# Altium PCB 7 segment 1 layer.PcbDoc
Units mil, origin at the board's own origin, x right, y up, seen from the top; angles counter-clockwise.
Board outline 5255.91 x 3681.1 mil, 2 copper layers (Top Layer, Bottom Layer); 50 components, 87 nets, 289 pads, 0 vias.
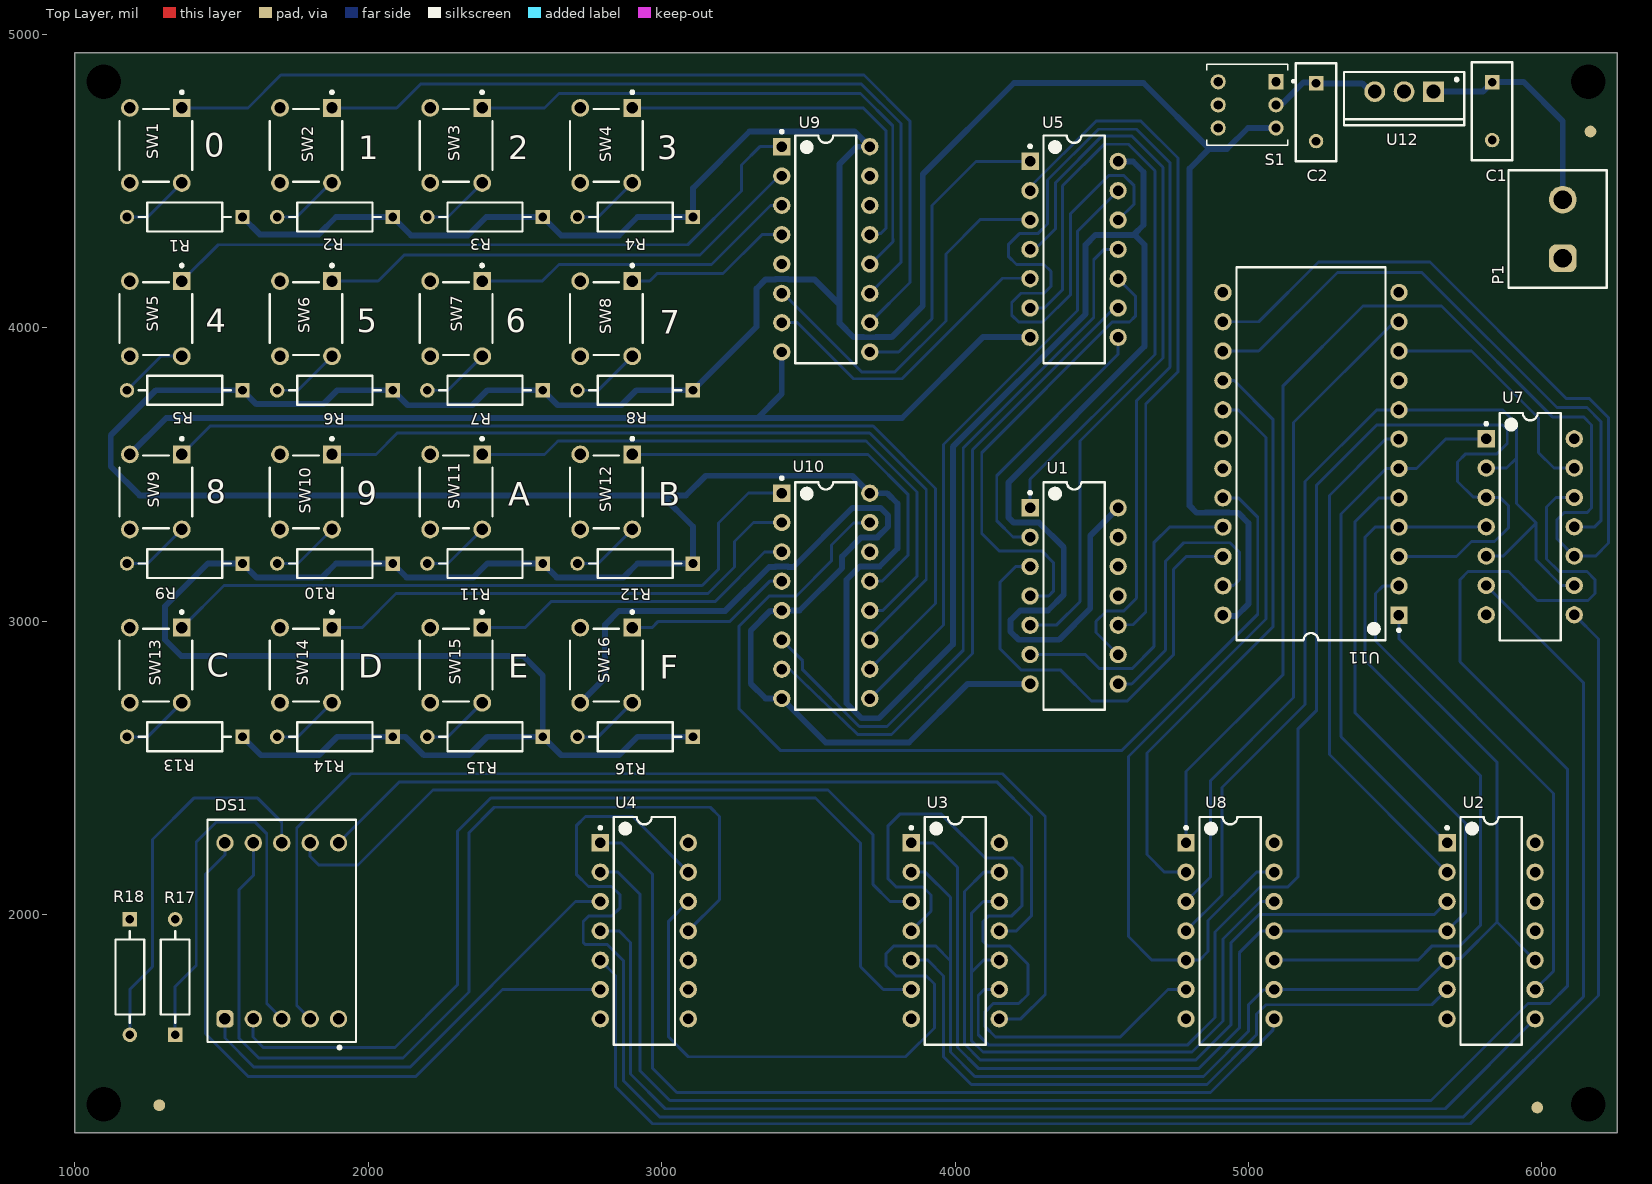
[diagram p0: Top Layer view]
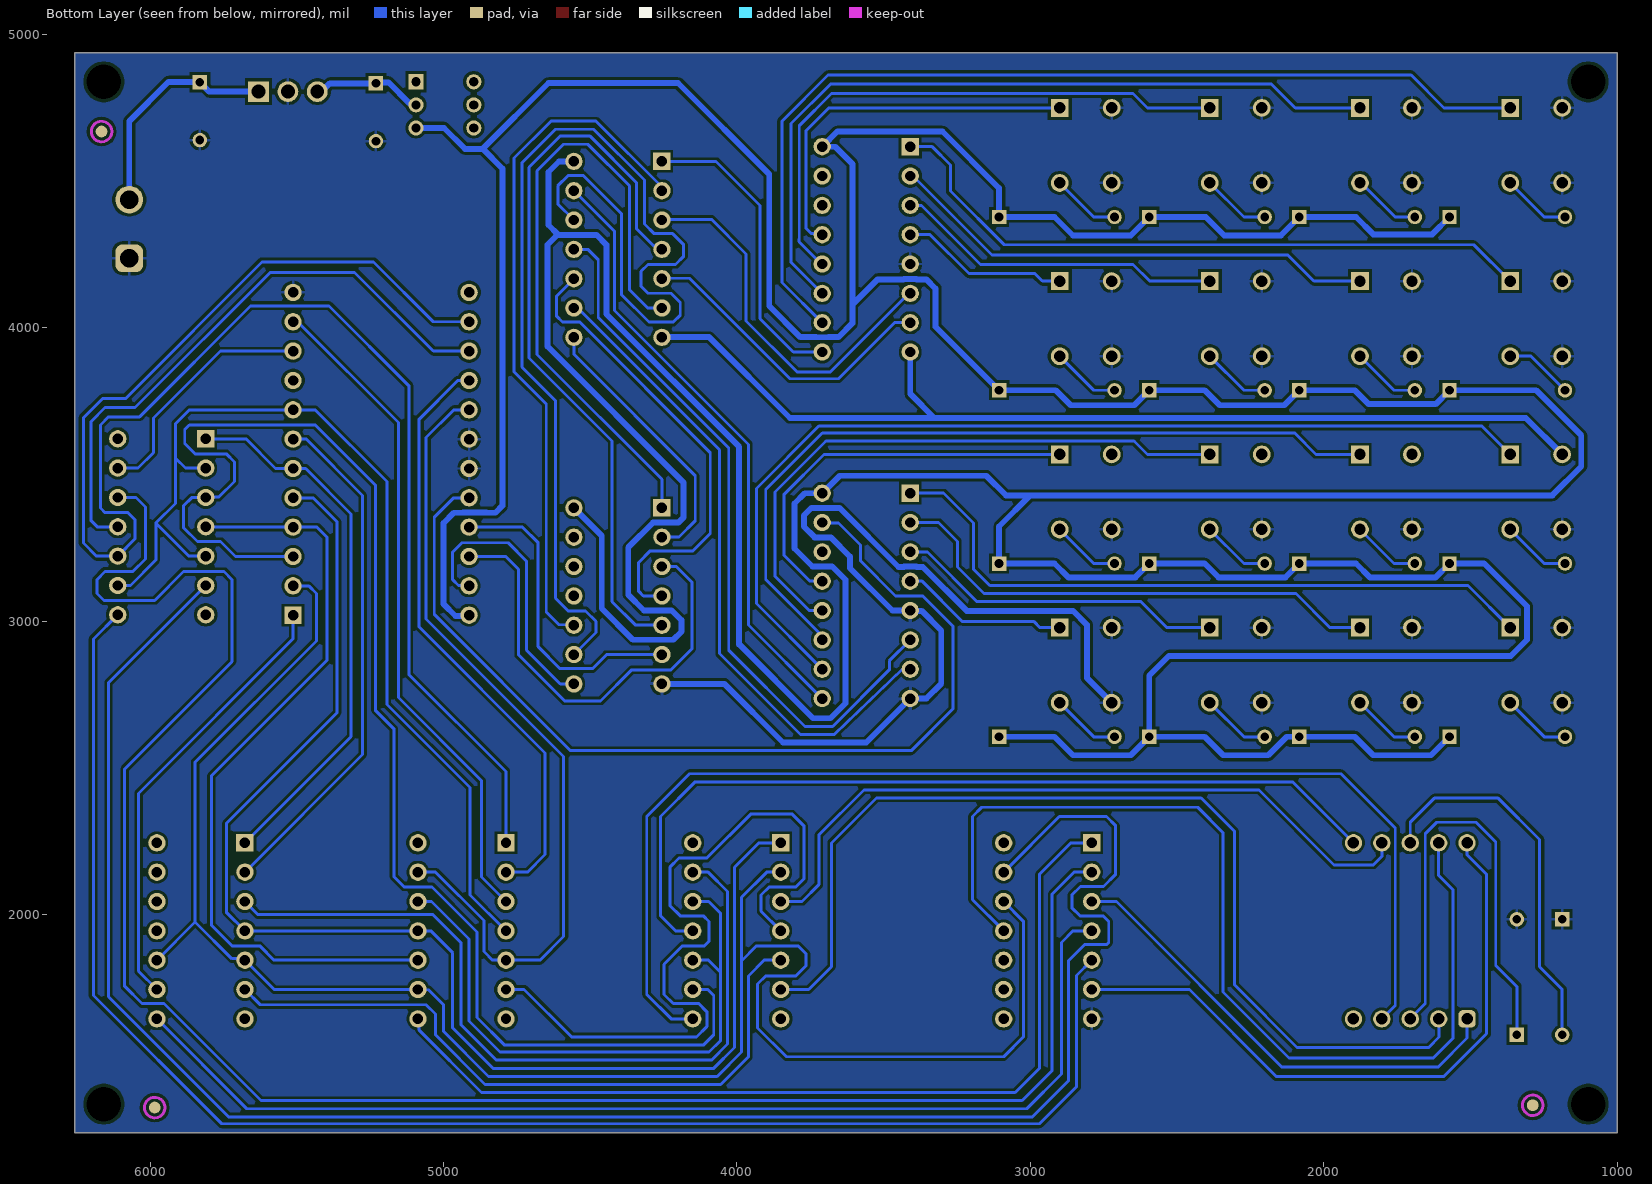
[diagram p1: Bottom Layer view, seen from below]
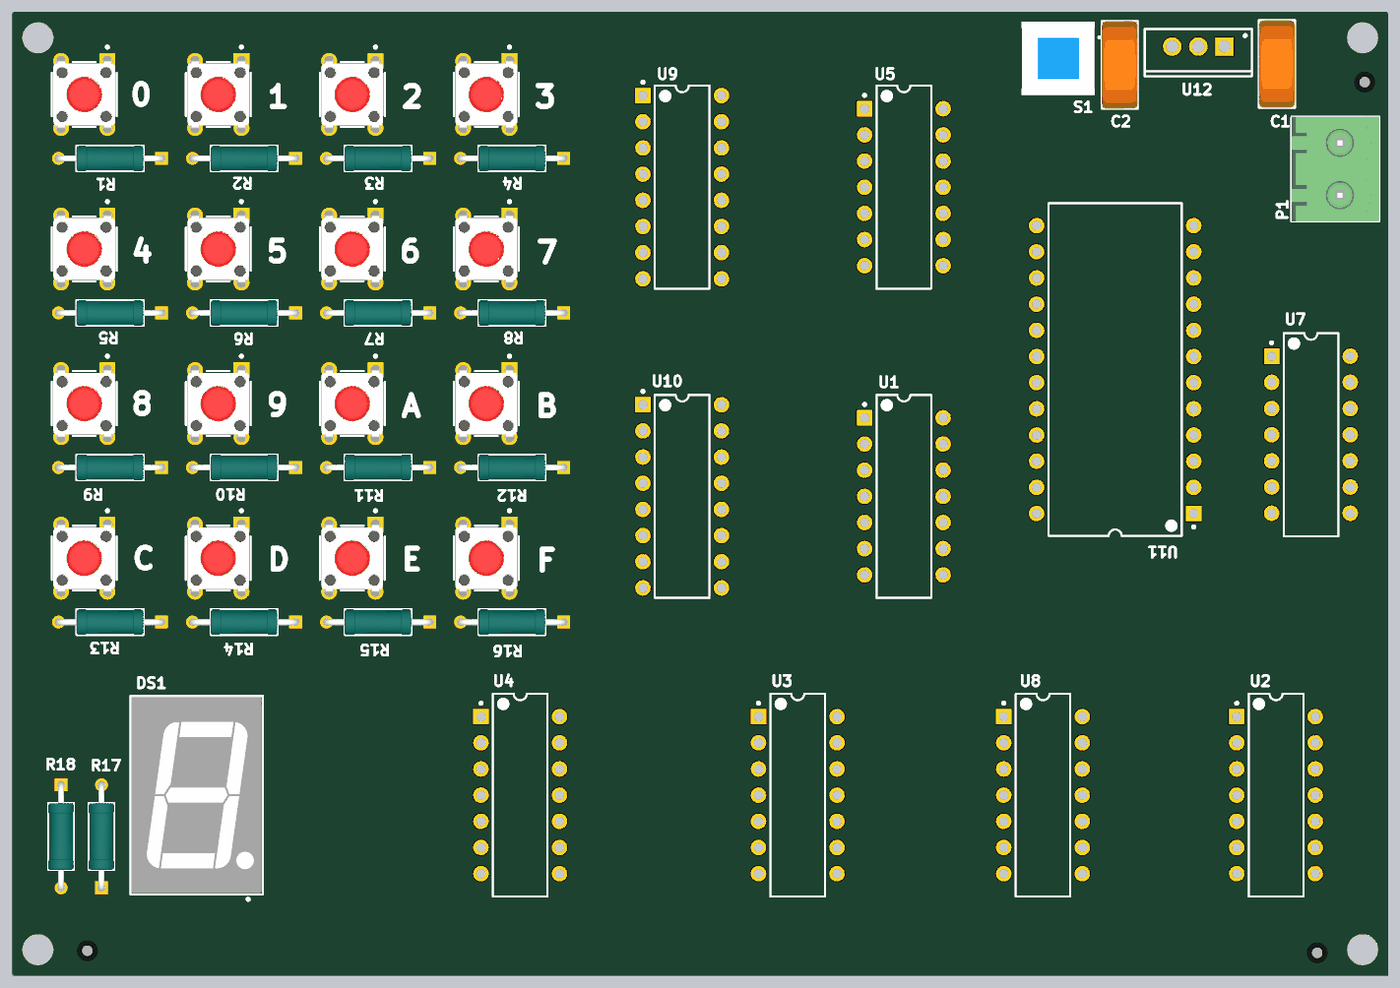
[diagram p2: 3D render of the assembled board from above, using the file's embedded part models]

## Layer stack, top to bottom
Top Solder: solder mask 0.4, Solder Resist, Dk 3.5
Top Layer: signal copper 1.4
Dielectric 1: dielectric 12.6, FR-4, Dk 4.8
Bottom Layer: signal copper 1.4
Bottom Solder: solder mask 0.4, Solder Resist, Dk 3.5

## Board outline
1000,1255.91 6255.91,1255.91 6255.91,4937.01 1000,4937.01

## Design rules (kind name [scope] priority, off if disabled: settings)
Clearance [All] p1: gap=10 ignorepadtopadclearanceinfootprint=FALSE except(118.11: Via-Via Via-Hole)
HoleSize [All] p1: absolutevalues=TRUE maxlimit=50 minlimit=1 maxpercent=80.000 minpercent=20.000
PolygonConnect [All] p1: connectstyle=Relief reliefconductorwidth=10 reliefentries=4 polygonreliefangle="90 Angle" airgapwidth=10
RoutingVias [All] p1: holewidth=28 width=50 viastyle="Through Hole" minholewidth=28 minwidth=50 maxholewidth=28 maxwidth=50
SolderMaskExpansion [All] p1: expansion=4 istentingtop=FALSE
SupplyNets "Schematic Supply Nets_1" [InNet('+5')] p1: voltage=0.000
SupplyNets "Schematic Supply Nets" [InNet('GND')] p2: voltage=0.000
UnRoutedNet [All] p1 off:
Width [All] p1: maxlimit=25 minlimit=10 preferedwidth=10 toplayer_maxwidth=10 minimp=50.000000 maximp=50.000000 favimp=50.000000
28 further rules are at their usual default settings.

## Classes and differential pairs
component class Designator: R1 R2 R3 R4 R5 R6 R7 R8 R9 R10 R11 R12 R13 R14 R15 R16 SW1 SW2 SW3 SW4 SW5 SW6 SW7 SW8 SW9 SW10 SW11 SW12 SW13 SW14 SW15 SW16
component class Top: C1 C2 P1 S1 U12

## Components (designator, comment, footprint, x,y, rotation, side; value= is the part's Value field where it differs from the comment)
C1 "D222K33Y5PL6UJ5R" FP-D222K33Y5PL6UJ5R-MFG 5830.16,4738.62 r270 top value=2.2nF
C2 "D222K33Y5PL6UJ5R" FP-D222K33Y5PL6UJ5R-MFG 5230.16,4735.2 r270 top value=2.2nF
DS1 "157142V12703" WL-T7DS_L19W12.6H7.9 1704.72,1944.88 r0 top
P1 "691311500002" 691311500002 6053.15,4337.01 r90 top
R1 "MRS25000C1001FCT00" FP-MRS25-MFG 1374.02,4377.95 r180 top
R2 "MRS25000C1001FCT00" FP-MRS25-MFG 1885.83,4377.95 r180 top
R3 "MRS25000C1001FCT00" FP-MRS25-MFG 2397.64,4377.95 r180 top
R4 "MRS25000C1001FCT00" FP-MRS25-MFG 2909.45,4377.95 r180 top
R5 "MRS25000C1001FCT00" FP-MRS25-MFG 1374.02,3787.4 r180 top
R6 "MRS25000C1001FCT00" FP-MRS25-MFG 1885.83,3787.4 r180 top
R7 "MRS25000C1001FCT00" FP-MRS25-MFG 2397.64,3787.4 r180 top
R8 "MRS25000C1001FCT00" FP-MRS25-MFG 2909.45,3787.4 r180 top
R9 "MRS25000C1001FCT00" FP-MRS25-MFG 1374.02,3196.85 r180 top
R10 "MRS25000C1001FCT00" FP-MRS25-MFG 1885.83,3196.85 r180 top
R11 "MRS25000C1001FCT00" FP-MRS25-MFG 2397.64,3196.85 r180 top
R12 "MRS25000C1001FCT00" FP-MRS25-MFG 2909.45,3196.85 r180 top
R13 "MRS25000C1001FCT00" FP-MRS25-MFG 1374.02,2606.3 r180 top
R14 "MRS25000C1001FCT00" FP-MRS25-MFG 1885.83,2606.3 r180 top
R15 "MRS25000C1001FCT00" FP-MRS25-MFG 2397.64,2606.3 r180 top
R16 "MRS25000C1001FCT00" FP-MRS25-MFG 2909.45,2606.3 r180 top
R17 "MRS25000C1001FCT00" FP-MRS25-MFG 1341.34,1787.4 r90 top
R18 "MRS25000C1001FCT00" FP-MRS25-MFG 1187.01,1787.4 r270 top
S1 "TL2230OAF140" SW_TL2230OAF140 4995.16,4760.2 r270 top
SW1 "1-1825910-5" FP-1-1825910-5-MFG 1275.59,4622.05 r0 top
SW2 "1-1825910-5" FP-1-1825910-5-MFG 1787.4,4622.05 r0 top
SW3 "1-1825910-5" FP-1-1825910-5-MFG 2299.21,4622.05 r0 top
SW4 "1-1825910-5" FP-1-1825910-5-MFG 2811.02,4622.05 r0 top
SW5 "1-1825910-5" FP-1-1825910-5-MFG 1275.59,4031.5 r0 top
SW6 "1-1825910-5" FP-1-1825910-5-MFG 1787.4,4031.5 r0 top
SW7 "1-1825910-5" FP-1-1825910-5-MFG 2299.21,4031.5 r0 top
SW8 "1-1825910-5" FP-1-1825910-5-MFG 2811.02,4031.5 r0 top
SW9 "1-1825910-5" FP-1-1825910-5-MFG 1275.59,3440.94 r0 top
SW10 "1-1825910-5" FP-1-1825910-5-MFG 1787.4,3440.94 r0 top
SW11 "1-1825910-5" FP-1-1825910-5-MFG 2299.21,3440.94 r0 top
SW12 "1-1825910-5" FP-1-1825910-5-MFG 2811.02,3440.94 r0 top
SW13 "1-1825910-5" FP-1-1825910-5-MFG 1275.59,2850.39 r0 top
SW14 "1-1825910-5" FP-1-1825910-5-MFG 1787.4,2850.39 r0 top
SW15 "1-1825910-5" FP-1-1825910-5-MFG 2299.21,2850.39 r0 top
SW16 "1-1825910-5" FP-1-1825910-5-MFG 2811.02,2850.39 r0 top
U1 "SN7432N" N0014A 4405.51,3086.61 r0 top
U2 "SN74S08N" N0014A 5826.77,1944.88 r0 top
U3 "SN74S08N" N0014A 4000.39,1944.88 r0 top
U4 "SN74S08N" N0014A 2940.55,1944.88 r0 top
U5 "SN74HCU04N" N0014A 4405.51,4267.72 r0 top
U7 "SN74LS11N" N0014A 5960.24,3322.05 r0 top
U8 "SN74LS11N" N0014A 4937.01,1944.88 r0 top
U9 "SN74LS148N" N0016A 3559.06,4267.72 r0 top
U10 "SN74LS148N" N0016A 3559.06,3086.61 r0 top
U11 "SN74154N" N0024A 5212.6,3570.87 r180 top
U12 "L7805CP" TO220FP 5530.16,4805.2 r180 top

## Footprints (in the part's own frame and the unit in brackets; to place one, negate y for a bottom-side part, rotate by r counter-clockwise, add the part's x,y. Pads: shape width x height; smd on the part's side, far side on the other; paste and mask are expansions set on the pad)
691311500002 [mm] "5,08mm - PCB Headers - Vertical - Opened ends -02p"
  rrect50% 2.4x2.4 hole 1.6: 1(-2.54,-0.45)
  round 2.4 hole 1.6: 2(2.54,-0.45)
  silkscreen extent -5.08,-4.25 5.08,4.25, body extent -5.08,-4.25 5.08,4.25, height 12.05
FP-1-1825910-5-MFG [mm]
  rect 1.54x1.54 hole 0.99 paste-2539.97 mask+0: 1(2.25,3.25)
  round 1.54 hole 0.99 paste-2539.97 mask+0: 2(2.25,-3.25) 3(-2.25,3.25) 4(-2.25,-3.25)
  silkscreen extent -3.15,-3.15 3.15,4.72, body extent -3.24,-4.12 3.24,4.12, height 0.25
FP-D222K33Y5PL6UJ5R-MFG [mm]
  rect 1.25x1.25 hole 0.75 paste-2539.97 mask+0: 1(-2.5,0)
  round 1.25 hole 0.75 paste-2539.97 mask+0: 2(2.5,0)
  silkscreen extent -4.25,-1.75 4.25,1.75, body extent -4.35,-1.85 4.35,1.85, height 0.25
FP-MRS25-MFG [mm]
  rect 1.25x1.25 hole 0.75 paste-2539.97 mask+0: 1(-5,0)
  round 1.25 hole 0.75 paste-2539.97 mask+0: 2(5,0)
  silkscreen extent -3.97,-1.25 3.98,1.25, body extent -5.72,-1.35 5.73,1.35, height 0.25
N0014A [mm] "DIP, 14-Leads, Body 19.7x6.6mm, Pitch 2.54mm"
  rect 1.5x1.5 hole 0.9: 1(-3.81,7.62)
  round 1.5 hole 0.9: 2(-3.81,5.08) 3(-3.81,2.54) 4(-3.81,0) 5(-3.81,-2.54) 6(-3.81,-5.08) 7(-3.81,-7.62) 8(3.81,-7.62) 9(3.81,-5.08) 10(3.81,-2.54) 11(3.81,0) 12(3.81,2.54) 13(3.81,5.08) 14(3.81,7.62)
  silkscreen extent -3.93,-9.85 2.65,9.85, body extent -3.95,-9.85 3.95,9.85, height 5.08
N0016A [mm] "DIP, 16-Leads, Body 19.7x6.6mm, Pitch 2.54mm"
  rect 1.5x1.5 hole 0.9: 1(-3.81,8.89)
  round 1.5 hole 0.9: 2(-3.81,6.35) 3(-3.81,3.81) 4(-3.81,1.27) 5(-3.81,-1.27) 6(-3.81,-3.81) 7(-3.81,-6.35) 8(-3.81,-8.89) 9(3.81,-8.89) 10(3.81,-6.35) 11(3.81,-3.81) 12(3.81,-1.27) 13(3.81,1.27) 14(3.81,3.81) 15(3.81,6.35) 16(3.81,8.89)
  silkscreen extent -3.93,-9.85 2.65,10.31, body extent -3.95,-9.85 3.95,9.85, height 5.08
N0024A [mm] "DIP, 24-Leads, Body 32.25x14.2mm, Pitch 2.54mm"
  rect 1.5x1.5 hole 0.9: 1(-7.62,13.97)
  round 1.5 hole 0.9: 2(-7.62,11.43) 3(-7.62,8.89) 4(-7.62,6.35) 5(-7.62,3.81) 6(-7.62,1.27) 7(-7.62,-1.27) 8(-7.62,-3.81) 9(-7.62,-6.35) 10(-7.62,-8.89) 11(-7.62,-11.43) 12(-7.62,-13.97) 13(7.62,-13.97) 14(7.62,-11.43) 15(7.62,-8.89) 16(7.62,-6.35) 17(7.62,-3.81) 18(7.62,-1.27) 19(7.62,1.27) 20(7.62,3.81) 21(7.62,6.35) 22(7.62,8.89) 23(7.62,11.43) 24(7.62,13.97)
  silkscreen extent -7.75,-16.15 6.45,16.15, body extent -7.76,-16.12 7.76,16.12, height 5.08
SW_TL2230OAF140 [mm]
  rect 1.308x1.308 / inner round 1.308 / far side rect 1.308x1.308 hole 0.8: 1(-2,2.5)
  round 1.308 hole 0.8: 2(0,2.5) 3(2,2.5) 4(-2,-2.5) 5(0,-2.5) 6(2,-2.5)
  silkscreen extent -3.5,-3.5 3.5,4.1, body extent -3.5,-3.5 3.5,3.5, height 12.5
TO220FP [mm] "TO, Thru-Hole, Vertical, Heatsink Mounted; 3 In-Line Leads; Pitch 2.54 mm"
  rect 1.8x1.8 hole 1.2: 1(-2.54,0)
  round 1.8 hole 1.2: 2(0,0) 3(2.54,0)
  silkscreen extent -5.2,-1.7 5.2,2.9, body extent -5.25,-1.75 5.25,2.95, height 20
WL-T7DS_L19W12.6H7.9 [mm] "7 Segments Display THT Single Digit , body 12.6x19mm"
  rrect50% 1.5x1.5 hole 1: 1(-4.92,-7.62)
  round 1.5 hole 1: 2(-2.46,-7.62) 3(0,-7.62) 4(2.46,-7.62) 5(4.92,-7.62) 6(4.92,7.62) 7(2.46,7.62) 8(0,7.62) 9(-2.46,7.62) 10(-4.92,7.62)
  silkscreen extent -6.43,-10.22 6.43,9.62, body extent -6.3,-9.5 6.3,9.5, height 8.1

## Part data
C1 C2: library part CMP-02417-000074-1, "CAP CER 2200PF 500V Y5P RADIAL", Capacitance=2.2nF, Case/Package=Radial, Dielectric=Y5P, Max Operating Temperature=85°C, Min Operating Temperature=-30°C, Package Quantity=2000, Resistor Type=Ceramic, Tolerance=10%, Voltage Rating=500V, Construction=RADIAL, Contact Plating=Tin, Depth=4mm, Lead Diameter=0.6mm, Lead Pitch=5mm, Lead/Base Style=Kinked, Mount="Through Hole", Packaging="Tape and Reel", Radiation Hardening=No, RoHS Compliant=Yes, Series=D, Termination=Radial
DS1: library part CMP-03913-119894004-1, "157142V12703 7-Seg Display, Comm Cathode, Grn, 46Mcd Rohs Compliant: Yes", Forward Current=100mA, Forward Voltage=2.2V, Max Operating Temperature=85°C, Max Reverse Voltage (DC)=5V, Min Operating Temperature=-40°C, Dominant Wavelength=572nm, Height=8mm, Length=19mm, Luminous Intensity=25mcd, NexarPartId=119894004, RoHS=Compliant, Width=12.6mm
P1: library part CMP-1502-02123-2, Color=Green, Current=20A, Voltage=300V, Contact Material=Brass, Contact Plating=Tin, Gender=Male, Height=12mm, Lead Pitch=5.08mm, Length=8.5mm, Mount="Through Hole", NexarPartId=8917741, Number of Contacts=2, Number of Levels=1, Number of Pins=2, Number of Positions Per Level=2, Number of Rows=1, Orientation=Vertical, Packaging=Box, Pitch=5.08mm, REACH SVHC=Unknown, RoHS=Compliant, Termination=Solder, Width=10.16mm
R1 R2 R3 R4 R5 R6 R7 R8 R9 R10 R11 R12 R13 R14 R15 R16 R17 R18: library part CMP-02408-000051-1, "RES 1K OHM 0.6W 1% AXIAL", Case/Package=Axial, Max Operating Temperature=155°C, Max Power Dissipation=600mW, Min Operating Temperature=-55°C, Package Quantity=5000, Resistance=1kR, Resistance Tolerance=1%, Resistor Type="Metal Film", Temperature Coefficient=50ppm/°C, Voltage Rating=350V, Construction=Cylindrical, Contact Plating=Tin, Diameter=2.5mm, Lead Diameter=0.6mm, Lead Free="Lead Free", Length=6.5mm, Military Standard=Not, Mount="Through Hole", Number of Pins=2, Number of Terminations=2, Packaging="Tape and Reel", Power Rating=600mW, Radiation Hardening=No, RoHS Compliant=Yes, Series=MRS25, Technology="THIN FILM", Termination=Axial, Tolerance=1%, Voltage Rating (DC)=350V, Weight=0.00776oz, Width=2.5mm
S1: "Pushbutton Switch DPDT Standard Through Hole", Package=None, Check_prices=https://www.snapeda.com/parts/TL2230OAF140/E-Switch/view-part/?ref=eda, MF=E-Switch, MP=TL2230OAF140, SnapEDA_Link=https://www.snapeda.com/parts/TL2230OAF140/E-Switch/view-part/?ref=snap
SW1 SW2 SW3 SW4 SW5 SW6 SW7 SW8 SW9 SW10 SW11 SW12 SW13 SW14 SW15 SW16: library part CMP-03407-000006-1, "SWITCH TACTILE SPST-NO 0.05A 24V", Actuator Color=Red, Contact Current Rating=50mA, Contact Resistance=100mR, Max Operating Temperature=85°C, Max Voltage Rating (DC)=24V, Min Operating Temperature=-35°C, Operating Force=2.55N, Package Quantity=750, Actuator Length=5.9mm, Actuator Material=PBT, Actuator Type=Standard, Contact Material=Brass, Contact Plating=Silver, Electrical Life=100000Cycles, Illumination Type=Non-Illuminated, Length=5.99mm, Max Current Rating=50mA, Mechanical Life=100000Cycles, Mount="Through Hole", Orientation=Straight, Packaging="Loose Piece", Radiation Hardening=No, RoHS Compliant=Yes, Series="FSMJ, Alcoswitch", Switch Function=Off-Mom, Switch Travel=0.25mm, Termination="PC Pins", Throw Configuration=SPST, Type=Switch, Voltage Rating (DC)=24V
U1: library part CMP-1573-00140-3, "Quad 2-input positive-OR gates, N0014A, TUBE", F @ Nom Voltage(Max)(Mhz)=100, Generic Part Number=SN7432, ICC @ Nom Voltage(Max)(mA)=0.038, Manufacturer="Texas Instruments", Operating Temperature Range(C)="0 to 70", Rating=Catalog, tpd @ Nom Voltage(Max)(ns)=22, Voltage(Nom)(V)=5, Bits(#)=4, Code_JEDEC=MS-001, DatasheetVersion=SDLS100, Input Type=TTL, Output Drive (IOL/IOH)(Max)(mA)=0.8/-16, Output Type=TTL, PackageReference=N0014A, PackageVersion=http://www.ti.com/lit/ml/mpdi002c/mpdi002c.pdf, VCC(Max)(V)=5.25, VCC(Min)(V)=4.75
U2 U3 U4: library part CMP-0777-00282-3, "Quad 2-input positive-AND gates, N0014A, TUBE", F @ Nom Voltage(Max)(Mhz)=50, Generic Part Number=SN74S08, ICC @ Nom Voltage(Max)(mA)=0.032, Manufacturer="Texas Instruments", Operating Temperature Range(C)="0 to 70", Rating=Catalog, tpd @ Nom Voltage(Max)(ns)=7.5, Voltage(Nom)(V)=5, Bits(#)=4, DatasheetVersion=SDLS033, Input Type=TTL, Output Drive (IOL/IOH)(Max)(mA)=-24/24, Output Type=TTL, PackageReference=N0014A, Schmitt Trigger=No, Technology Family=S, VCC(Max)(V)=5.25, VCC(Min)(V)=4.75
U5: library part CMP-1615-00910-2, "Hex Inverters, N0014A, TUBE", F @ Nom Voltage(Max)(Mhz)=20, Generic Part Number=SN74HCU04, ICC @ Nom Voltage(Max)(mA)=0.02, Manufacturer="Texas Instruments", Operating Temperature Range(C)="-40 to 85", Rating=Catalog, Voltage(Nom)(V)=5, Bits(#)=6, Code_JEDEC=MS-001, DatasheetVersion=SCLS079E, Input Type=CMOS, Output Drive (IOL/IOH)(Max)(mA)=-4/4, Output Type=CMOS, PackageReference=N0014A, Schmitt Trigger=No, Technology Family=HC, tpd @ Nom Voltage(Max)(ns)=20, VCC(Max)(V)=6, VCC(Min)(V)=2
U7 U8: library part CMP-0777-00254-3, "Triple 3-input positive-AND gates, N0014A, TUBE", F @ Nom Voltage(Max)(Mhz)=35, Generic Part Number=SN74LS11, ICC @ Nom Voltage(Max)(mA)=0.0036, Manufacturer="Texas Instruments", Operating Temperature Range(C)="0 to 70", Rating=Catalog, tpd @ Nom Voltage(Max)(ns)=15, Voltage(Nom)(V)=5, Bits(#)=3, DatasheetVersion=SDLS131, Input Type=TTL, Output Drive (IOL/IOH)(Max)(mA)=0/8, Output Type=TTL, PackageReference=N0014A, Schmitt Trigger=No, Technology Family=LS, VCC(Max)(V)=5.25, VCC(Min)(V)=4.75
U9 U10: library part CMP-1633-00673-2, "8-line to 3-line priority encoder, N0016A, TUBE", F @ Nom Voltage(Max)(Mhz)=35, Generic Part Number=SN74LS148, ICC @ Nom Voltage(Max)(mA)=20, Manufacturer="Texas Instruments", Operating Temperature Range(C)="0 to 70", Rating=Catalog, tpd @ Nom Voltage(Max)(ns)=19, Voltage(Nom)(V)=5, Bits(#)=8, Channels(#)=1, Code_JEDEC=MS-001, Configuration=8：3, DatasheetVersion=SDLS053B, Function=Encoder/Multiplexer, Input Type=TTL, Output Drive (IOL/IOH)(Max)(mA)=8/-0.4, Output Type=TTL, PackageReference=N0016A, Schmitt Trigger=No, Technology Family=LS, Type=Standard, VCC(Max)(V)=5.25, VCC(Min)(V)=4.75
U11: library part CMP-1633-00734-2, "4-Line To 16-Line Decoders/Demultiplexers, N0024A, TUBE", Generic Part Number=SN74154, Manufacturer="Texas Instruments", Code_JEDEC=MS-011, DatasheetVersion=SDLS056, PackageReference=N0024A
U12: library part CMP-0244-00474-1, "Positive Voltage Regulator, 5V, 3-Pin TO-220FP", ComponentLink1Description="Manufacturer URL", ComponentLink1URL=http://www.st.com, ComponentLink2Description=Datasheet, ComponentLink2URL=http://www.st.com/internet/com/TECHNICAL_RESOURCES/TECHNICAL_LITERATURE/DATASHEET/CD00000444.pdf, DatasheetVersion=16/11/2011, PackageDescription="TO, Thru-Hole, Vertical, Heatsink Mounted; 3 In-Line Leads; Pitch 2.54 mm", PackageReference=TO220FP, PackageVersion=2011

## Free pads (board coordinates)
  round 0 hole 118.11: 13(6157.48,4838.58) 14(1098.43,4838.58) 15(1098.43,1354.33) 16(6157.48,1354.33)
  round 40 smd mask+20: 20(1287.4,1350.39) 20(5984.25,1342.52) 20(6165.35,4669.29)
  round 40 smd far side mask+20: 20(1287.4,1350.39) 20(5984.25,1342.52) 20(6165.35,4669.29)

## Nets (pads, with @x,y where several pads share a name; then routed paths per layer and width w, separated by ;. In a path a pad name is that pad's centre, name@x,y a point inside that pad or via, vN(x,y) a via of type N, cw(c..) or ccw(c..) an arc to the next point about the centre after c; other vN are vias at no path point)
1A0': U5.1 U9.9 | length 1041.7
  Bottom Layer w10: U9.9 3807.48,3917.72 3921.26,4031.5 3921.26,4417.32 4070.87,4566.93 4254.72,4566.93 U5.1
1A1': U5.5 U9.7 | length 1068.1
  Bottom Layer w10: U9.7 3462.6,4017.72 3653.54,3826.77 3818.9,3826.77 4161.42,4169.29 4253.94,4169.29 U5.5
1A2': U5.3 U9.6 | length 1307.2
  Bottom Layer w10: U9.6 3413.78,4117.72 3681.1,3850.39 3795.28,3850.39 3968.5,4023.62 3968.5,4251.97 4086.61,4370.08 4253.15,4370.08 U5.3
2A0': U5.13 U10.9 | length 2082.1
  Bottom Layer w10: U10.9@3709.06,2736.22 3960.63,2987.8 3960.63,3602.36 4417.32,4059.06 4417.32,4329.53 U5.13
2A1': U5.9 U10.7 | length 2245.1
  Bottom Layer w10: U10.7 3431.07,2837.09 3435.2,2837.09 3667.96,2614.17 3783.46,2614.17 4059.06,2889.76 4059.06,3584.53 4542.24,4067.72 U5.9
2A2': U5.11 U10.6 | length 2479
  Bottom Layer w10: U10.6 3480.32,2865.35 3480.32,2834.65 3673.23,2641.73 3767.72,2641.73 4027.56,2901.57 4027.56,3590.55 4472.44,4035.43 4472.44,4232.28 4507.87,4267.72 U5.11
+5: R1.1 R2.1 R3.1 R4.1 R5.1 R6.1 R7.1 R8.1 R9.1 R10.1 R11.1 R12.1 R13.1 R14.1 R15.1 R16.1 S1.3 U1.14 U5.14 U9.16 U10.16 U11.24 | length 24574.2
  Bottom Layer w20: R13.1 1633.86,2543.31 1830.71,2543.31 1893.7,2606.3 R14.1 2125.98,2606.3 2188.98,2543.31 2342.52,2543.31 2405.51,2606.3 R15.1 ; R1.1 1629.92,4318.9 1830.71,4318.9 1889.76,4377.95 R2.1 2145.67,4314.96 2338.58,4314.96 2401.57,4377.95 R3.1 2657.48,4314.96 2854.33,4314.96 2917.32,4377.95 R4.1 3106.3,4476.38 3299.21,4669.29 3657.48,4669.29 U9.16 3708.62,4617.28 3664.53,4617.28 3606.3,4559.06 3606.3,4078.74 ; R16.1 2917.32,2606.3 2854.33,2543.31 2657.48,2543.31 R15.1 ; U1.14 4460.63,3291.73 4460.63,3043.31 4354.33,2937.01 4216.54,2937.01 4188.98,2964.57 4188.98,3003.94 4222.13,3037.09 4316.61,3037.09 4370.08,3090.55 4370.08,3251.97 4285.91,3336.14 4199.29,3336.14 4181.31,3354.13 4181.31,3472.65 4645.67,3937.01 4645.67,4283.46 4618.11,4311.02 4610.24,4318.9 4641.73,4350.39 4641.73,4531.5 4606.3,4566.93 4556.3,4566.93 U5.14 ; 4611.89,4317.24 4478.66,4317.24 4444.88,4283.46 4444.88,4047.24 3992.13,3594.49 3992.13,2921.26 3740.16,2669.29 3681.1,2669.29 3629.92,2720.47 3629.92,3141.73 3675.28,3187.09 3742.2,3187.09 3803.15,3248.03 3803.15,3401.57 3768.11,3436.61 U10.16 3649.61,3496.06 3149.61,3496.06 3082.68,3429.13 3000,3429.13 ; U11.24 4915.11,3018.35 4959.3,3018.35 4999.37,3058.42 4999.37,3147.01 5000,3147.64 5000,3334.65 4964.57,3370.08 4933.43,3370.08 4933.11,3370.39 4852.71,3370.39 4852.4,3370.08 4822.83,3370.08 4799.21,3393.7 4799.21,4543.31 4866.14,4610.24 ; S1.3 4998.05,4681.46 4926.83,4610.24 4866.14,4610.24 ; R15.1 2594.49,2814.96 2527.56,2881.89 1362.2,2881.89 1307.09,2937.01 1307.09,3051.18 1452.76,3196.85 R9.1 1618.11,3149.61 1842.52,3149.61 1889.76,3196.85 R10.1 2129.92,3149.61 2358.27,3149.61 2405.51,3196.85 R11.1 2641.73,3149.61 2870.08,3149.61 2917.32,3196.85 R12.1 3106.3,3322.83 3000,3429.13 ; 3000,3429.13 1220.47,3429.13 1122.05,3527.56 1122.05,3633.86 1275.59,3787.4 R5.1 1618.11,3740.16 1846.46,3740.16 1893.7,3787.4 R6.1 2133.86,3736.22 2354.33,3736.22 2405.51,3787.4 R7.1 2645.67,3736.22 2862.2,3736.22 2913.39,3787.4 R8.1 3322.83,4003.94 3322.83,4133.86 3354.33,4165.35 3386.65,4165.35 3388.54,4167.24 3429.57,4167.24 3431.46,4165.35 3519.69,4165.35 3606.3,4078.74 ; 3606.3,4078.74 3606.3,4015.75 3653.54,3968.5 3688.23,3968.5 3688.54,3968.19 3729.57,3968.19 3729.89,3968.5 3783.46,3968.5 3889.76,4074.8 3889.76,4523.62 4200.79,4834.65 4641.73,4834.65 4866.14,4610.24
A: DS1.7 U3.3 | length 2470
  Bottom Layer w10: DS1.7 1801.57,2198.43 1830.71,2169.29 1964.57,2169.29 2220.47,2425.2 3566.93,2425.2 3720.47,2271.65 3720.47,2102.36 3777.95,2044.88 U3.3
B: DS1.6 U3.11 | length 2965.7
  Bottom Layer w10: DS1.6 2106.3,2452.76 4141.73,2452.76 4259.84,2334.65 4259.84,1996.06 4208.66,1944.88 U3.11
C: DS1.4 U3.8 | length 4155
  Bottom Layer w10: DS1.4 1755.91,1690.55 1755.91,2295.28 1940.94,2480.32 4161.42,2480.32 4307.09,2334.65 4307.09,1728.35 4223.62,1644.88 U3.8
D: DS1.2 U3.6 | length 3497.1
  Bottom Layer w10: DS1.2@1606.3,1644.88 1606.3,1582.68 1641.73,1547.24 2090.55,1547.24 2303.15,1759.84 2303.15,2283.46 2417.32,2397.64 3523.62,2397.64 3677.17,2244.09 3677.17,1822.83 3755.12,1744.88 U3.6
E: DS1.1 U4.3 | length 1619.8
  Bottom Layer w10: DS1.1 1511.02,1579.53 1610.24,1480.32 2141.73,1480.32 2706.3,2044.88 U4.3
F: DS1.9 U4.11 | length 3470.9
  Bottom Layer w10: DS1.9 1607.87,2133.86 1559.06,2085.04 1559.06,1578.74 1625.98,1511.81 2118.11,1511.81 2342.52,1736.22 2342.52,2279.53 2429.13,2366.14 3165.35,2366.14 3196.85,2334.65 3196.85,2051.18 U4.11
G: DS1.10 U4.6 | length 2206.4
  Bottom Layer w10: DS1.10 1511.02,2203.94 1444.88,2137.8 1444.88,1594.49 1590.55,1448.82 2161.42,1448.82 2457.48,1744.88 U4.6
GND: C1.2 C2.2 P1.1 R17.2 R18.1 SW1.3 SW1.4 SW2.3 SW2.4 SW3.3 SW3.4 SW4.3 SW4.4 SW5.3 SW5.4 SW6.3 SW6.4 SW7.3 SW7.4 SW8.3 SW8.4 SW9.4 SW10.4 SW11.4 SW12.4 SW13.3 SW13.4 SW14.3 SW14.4 SW15.3 SW15.4 SW16.3 SW16.4 U1.7 U4.7 U9.5 U10.5 U10.8 U11.12 U11.18 U11.19 U12.2 | length 3417.1
  Bottom Layer w20: SW16.4 2807.09,2807.09 2807.09,2988.19 2854.33,3035.43 3216.54,3035.43 3366.14,3185.04 3387.44,3185.04 3388.54,3186.14 3429.57,3186.14 3430.67,3185.04 3448.82,3185.04 3649.61,3385.83 3688.23,3385.83 3688.54,3386.14 3729.57,3386.14 3729.89,3385.83 3746.11,3385.83 3771.65,3360.28 3771.65,3322.83 3734.96,3286.14 3679.84,3286.14 3614.17,3220.47 3614.17,3181.1 3469.68,3036.61 U10.5 3407.87,3035.43 3370.08,3035.43 3303.15,2968.5 3303.15,2787.4 3353.94,2736.61 U10.8 3559.06,2586.61 3842.52,2586.61 4042.52,2786.61 U1.7
I0: SW1.1 U9.10 | length 3337.9
  Bottom Layer w10: SW1.1 1589.43,4750 1701.63,4862.2 3688.98,4862.2 3846.46,4704.72 3846.46,4155.12 U9.10
I1: SW2.1 U9.11 | length 2650.9
  Bottom Layer w10: SW2.1 2096.46,4750 2177.17,4830.71 3681.1,4830.71 3814.96,4696.85 3814.96,4223.62 U9.11
I2: SW3.1 U9.12 | length 1970.5
  Bottom Layer w10: SW3.1 2600.39,4750 2649.61,4799.21 3677.17,4799.21 3787.4,4688.98 3787.4,4303.15 3788.25,4302.3 3788.25,4294.02 U9.12@3710.76,4216.54
I3: SW4.1 U9.13 | length 1294
  Bottom Layer w10: SW4.1 3687.01,4750 3763.78,4673.23 3763.78,4338.58 3747.47,4322.27 3713.61,4322.27 U9.13
I4: SW5.1 U9.1 | length 2286.4
  Bottom Layer w10: SW5.1 1488.19,4283.46 3088.33,4283.46 3271.65,4466.79 3271.65,4555.12 3334.25,4617.72 U9.1
I5: SW6.1 U9.2 | length 1681.5
  Bottom Layer w10: SW6.1 2033.46,4159.45 2122.05,4248.03 3129.92,4248.03 3399.61,4517.72 U9.2
I6: SW7.1 U9.3 | length 1128.2
  Bottom Layer w10: SW7.1 2592.52,4159.45 2649.61,4216.54 3169.29,4216.54 3370.39,4417.63 3408.97,4417.63 U9.3
I7: SW8.1 U9.4 | length 575
  Bottom Layer w10: SW8.1 2958.66,4159.45 2984.25,4185.04 3208.66,4185.04 3341.34,4317.72 U9.4
I8: SW9.1 U10.10 | length 3405.8
  Bottom Layer w10: SW9.1 1460.63,3665.35 3720.47,3665.35 3933.07,3452.76 3933.07,3060.63 U10.10
I9: SW10.1 U10.11 | length 2727.6
  Bottom Layer w10: SW10.1 2025.59,3568.9 2098.43,3641.73 3708.66,3641.73 3901.57,3448.82 3901.57,3142.41 3709.06,2949.89 U10.11
I10: SW11.1 U10.12 | length 2069.7
  Bottom Layer w10: SW11.1 2600.39,3568.9 2642.74,3611.24 2645.67,3614.17 2720.55,3614.17 cw(c2722.44,3568.9) 2722.44,3614.21 2936.13,3614.21 2936.17,3614.17 3696.85,3614.17 3699.78,3611.24 3870.08,3440.95 3870.08,3153.54 3753.15,3036.61 U10.12
I11: SW12.1 U10.13 | length 1369.8
  Bottom Layer w10: SW12.1 3702.76,3568.9 3838.58,3433.07 3838.58,3224.41 3750.79,3136.61 U10.13
I12: SW13.1 U10.1 | length 2327.3
  Bottom Layer w10: SW13.1 1507.87,3122.05 3137.8,3122.05 3192.91,3177.17 3192.91,3334.65 3295.28,3437.01 3408.66,3437.01 U10.1
I13: SW14.1 U10.2 | length 1732.2
  Bottom Layer w10: SW14.1 1978.35,2978.35 2094.49,3094.49 3157.48,3094.49 3248.03,3185.04 3248.03,3271.65 3312.99,3336.61 U10.2
I14: SW15.1 U10.3 | length 1128.2
  Bottom Layer w10: SW15.1 2533.46,2978.35 2622.05,3066.93 3181.1,3066.93 3350.39,3236.22 3408.66,3236.22 U10.3
I15: SW16.1 U10.4 | length 576
  Bottom Layer w10: SW16.1 2966.54,2978.35 2988.19,3000 3232.28,3000 3370.08,3137.8 3407.87,3137.8 U10.4
NetC1_1: C1.1 P1.2 U12.1 | length 781
  Bottom Layer w20: U12.1 5798.31,4805.2 C1.1 5831.69,4838.58 5937.01,4838.58 6070.87,4704.72 P1.2@6070.87,4433.7
NetC2_1: C2.1 S1.2 U12.3 | length 381.5
  Bottom Layer w20: S1.2 5099.61,4766.22 5116.62,4766.22 5187.27,4836.87 5226.91,4836.87 C2.1 5387.26,4833.62 5415.68,4805.2 U12.3
NetDS1_3: DS1.3 R17.1 | length 1622.6
  Bottom Layer w10: R17.1 1341.34,1754.72 1413.39,1826.77 1413.39,2248.03 1480.32,2314.96 1614.17,2314.96 1653.54,2275.59 1653.54,1696.85 DS1.3@1704.72,1645.67
NetDS1_8: DS1.8 R18.2 | length 1300.6
  Bottom Layer w10: R18.2 1187.01,1746.06 1263.78,1822.83 1263.78,2255.91 1404.89,2397.01 1622.67,2397.01 1704.72,2314.96 DS1.8
NetR1_2: R1.2 SW1.2 | length 235.1
  Bottom Layer w10: R1.2 1248.03,4377.95 SW1.2
NetR2_2: R2.2 SW2.2 | length 235.1
  Bottom Layer w10: R2.2 1755.91,4377.95 1872.05,4494.09 SW2.2
NetR3_2: R3.2 SW3.2 | length 235.1
  Bottom Layer w10: R3.2 2271.65,4377.95 SW3.2
NetR4_2: R4.2 SW4.2 | length 235.1
  Bottom Layer w10: R4.2 2783.46,4377.95 SW4.2
NetR5_2: R5.2 SW5.2 | length 235.1
  Bottom Layer w10: R5.2 1293.31,3903.54 SW5.2
NetR6_2: R6.2 SW6.2 | length 235.1
  Bottom Layer w10: R6.2 1759.84,3787.4 SW6.2
NetR7_2: R7.2 SW7.2 | length 235.1
  Bottom Layer w10: R7.2 2271.65,3787.4 SW7.2
NetR8_2: R8.2 SW8.2 | length 235.1
  Bottom Layer w10: R8.2 2783.46,3787.4 SW8.2
NetR9_2: R9.2 SW9.2 | length 235.1
  Bottom Layer w10: R9.2 1248.03,3196.85 SW9.2
NetR10_2: R10.2 SW10.2 | length 235.1
  Bottom Layer w10: R10.2 1759.84,3196.85 SW10.2
NetR11_2: R11.2 SW11.2 | length 235.1
  Bottom Layer w10: R11.2 2271.65,3196.85 SW11.2
NetR12_2: R12.2 SW12.2 | length 235.1
  Bottom Layer w10: R12.2 2783.46,3196.85 SW12.2
NetR13_2: R13.2 SW13.2 | length 235.1
  Bottom Layer w10: R13.2 1248.03,2606.3 SW13.2
NetR14_2: R14.2 SW14.2 | length 235.1
  Bottom Layer w10: R14.2 1759.84,2606.3 SW14.2
NetR15_2: R15.2 SW15.2 | length 235.1
  Bottom Layer w10: R15.2 2271.65,2606.3 SW15.2
NetR16_2: R16.2 SW16.2 | length 235.1
  Bottom Layer w10: R16.2 2783.46,2606.3 SW16.2
NetSW9_3: SW9.3 U5.7 U9.8 | length 3493.2
  Bottom Layer w20: SW9.3 1311.02,3692.91 3326.77,3692.91 ; U9.8 3409.06,3775.2 3326.77,3692.91 ; U5.7 4254.72,3968.5 4094.49,3968.5 3818.9,3692.91 3326.77,3692.91
NetU1_1: U1.1 U5.6 | length 2227
  Bottom Layer w10: U1.1 4255.51,3483.86 4681.1,3909.45 4681.1,4535.43 4590.55,4625.98 4507.87,4625.98 4366.14,4484.25 4366.14,4129.92 4303.94,4067.72 U5.6
NetU1_2: U1.2 U5.8 | length 933.5
  Bottom Layer w10: U1.2 4254.72,3287.4 4196.85,3287.4 4141.73,3342.52 4141.73,3496.06 4555.51,3909.84 U5.8
NetU1_3: U1.3 U11.22 | length 1559.3
  Bottom Layer w10: U1.3 4206.3,3186.61 4153.54,3133.86 4153.54,2905.51 4224.41,2834.65 4358.27,2834.65 4464.57,2728.35 4586.61,2728.35 4741.17,2882.9 4744.09,2885.83 4744.09,3177.17 4787.8,3220.87 U11.22
NetU1_4: U1.4 U5.10 | length 1613.2
  Bottom Layer w10: U1.4 4318.9,3086.61 4334.65,3102.36 4334.65,3200.79 4295.28,3240.16 4149.61,3240.16 4090.55,3299.21 4090.55,3574.8 4535.43,4019.68 4594.49,4019.68 4614.17,4039.37 4614.17,4109.06 U5.10
NetU1_5: U1.5 U5.4 | length 2549.9
  Bottom Layer w10: U1.5 4344.88,2986.61 4425.2,3066.93 4425.2,3614.17 4708.66,3897.64 4708.66,4547.24 4602.36,4653.54 4500,4653.54 4342.52,4496.06 4342.52,4338.58 4285.07,4281.13 4282.2,4281.13 4268.79,4267.72 U5.4
NetU1_6: U1.6 U11.21 | length 1084.3
  Bottom Layer w10: U1.6 4444.09,2886.61 4447.02,2883.68 ; 4447.07,2883.68 4492.17,2838.58 4602.36,2838.58 4677.17,2913.39 4677.17,3267.72 4730.31,3320.87 U11.21
NetU1_8: U1.8 U11.23 | length 961.9
  Bottom Layer w10: U1.8 4601.57,2786.61 4716.54,2901.57 4716.54,3204.72 4779.53,3267.72 4937.01,3267.72 4968.5,3236.22 4968.5,3141.73 4948.82,3122.05 4913.78,3122.05 U11.23
NetU1_9: U1.9 U5.12 | length 4102.6
  Bottom Layer w10: U1.9 4480.31,2961.81 4480.31,3000 4515.75,3035.43 4574.8,3035.43 4618.11,3078.74 4618.11,3751.97 4732.28,3866.14 4732.28,4562.99 4618.11,4677.17 4488.19,4677.17 4314.96,4503.94 4314.96,4354.33 4281.78,4321.15 4218.78,4321.15 4181.1,4283.46 4181.1,4244.09 4208.66,4216.54 4303.15,4216.54 4326.77,4192.91 4326.77,4141.73 4303.15,4118.11 4224.41,4118.11 4192.91,4086.61 4192.91,4043.31 4216.54,4019.68 4299.21,4019.68 4393.7,4114.17 4393.7,4389.76 4523.62,4519.69 4574.8,4519.69 4610.24,4484.25 4610.24,4422.44 U5.12
NetU1_10: U1.10 U5.2 | length 2367.4
  Bottom Layer w10: U5.2 4255.51,4479.92 4480.31,4704.72 4633.86,4704.72 4759.84,4578.74 4759.84,3850.39 4649.61,3740.16 4649.61,3031.5 4606.3,2988.19 4557.09,2988.19 U1.10
NetU10_15: U10.15 U11.20 | length 3402.1
  Bottom Layer w10: U10.15 3707.09,3334.65 3653.54,3334.65 3578.74,3259.84 3578.74,3206.3 3459.06,3086.61 3366.14,3086.61 3263.78,2984.25 3263.78,2700.79 3405.51,2559.06 4566.93,2559.06 5031.5,3023.62 5031.5,3354.33 4964.96,3420.87 U11.20
O0: U2.9 U11.1 | length 1520.1
  Bottom Layer w10: U11.1 5512.6,2940.16 6039.37,2413.39 6039.37,1807.48 U2.9
O1: U2.5 U2.10 U3.2 U4.12 U8.9 U11.2 | length 6527.2
  Bottom Layer w10: U4.12 3023.62,1977.95 3023.62,1582.68 3090.55,1515.75 3830.71,1515.75 3929.13,1614.17 3929.13,1763.78 3901.57,1791.34 3799.21,1791.34 3763.78,1826.77 3763.78,1866.14 3791.34,1893.7 3933.07,1893.7 3984.25,1842.52 ; U3.2 3898.43,2144.88 3984.25,2059.06 3984.25,1842.52 ; U11.2 5459.45,3120.87 5433.07,3094.49 5433.07,2933.07 5846.46,2519.68 5846.46,1975.2 ; U2.10 5846.46,1975.2 ; 3984.25,1842.52 3984.25,1531.5 4066.93,1448.82 4846.46,1448.82 5000,1602.36 5000,1692.91 5051.18,1744.09 5086.22,1744.09 U8.9 5576.77,1744.88 U2.5 5681.93,1850.04 5721.3,1850.04 5846.46,1975.2
O2: U3.9 U7.3 U11.3 | length 4835.3
  Bottom Layer w10: U3.9 4099.21,1744.88 4078.74,1724.41 4078.74,1590.55 4114.17,1555.12 4791.34,1555.12 4885.83,1649.61 4885.83,1940.94 5039.37,2094.49 5133.86,2094.49 5169.29,2129.92 5169.29,2633.86 5232.28,2696.85 5232.28,3464.57 5437.01,3669.29 5866.14,3669.29 5881.89,3653.54 5881.89,3606.3 5846.46,3570.87 5740.16,3570.87 5712.6,3543.31 5712.6,3476.38 5765.71,3423.27 5809.02,3423.27 U7.3 5811.02,3421.26 5858.27,3421.26 5885.83,3393.7 5885.83,3318.9 5838.58,3271.65 5759.84,3271.65 5709.06,3220.87 U11.3
O3: U7.4 U8.10 U11.4 | length 2667.8
  Bottom Layer w10: U8.10 5577.17,1844.88 5625.98,1893.7 5720.47,1893.7 5791.34,1964.57 5791.34,2472.44 5397.64,2866.14 5397.64,3287.4 5431.1,3320.87 U11.4 U7.4@5805.12,3320.87 ; U7.4@5805.51,3326.77 U7.4
O4: U2.4 U3.1 U8.11 U11.5 | length 4609.4
  Bottom Layer w10: U3.1 3924.41,2244.88 4007.87,2161.42 4007.87,1547.24 4078.74,1476.38 4830.71,1476.38 4968.5,1614.17 4968.5,1870.08 5043.31,1944.88 U8.11 U2.4 5740.16,2008.27 5740.16,2311.02 5365.13,2686.05 5362.2,2688.98 5362.2,3338.58 5444.49,3420.87 U11.5
O5: U2.1 U7.1 U11.6 | length 1872.4
  Bottom Layer w10: U2.1 5314.96,2606.69 5314.96,3366.14 5469.69,3520.87 U11.6 5572.05,3520.87 5673.23,3622.05 U7.1
O6: U2.2 U11.7 | length 1766.9
  Bottom Layer w10: U11.7 5467.32,3620.87 5275.59,3429.13 5275.59,2546.06 U2.2
O7: U7.2 U7.5 U7.9 U8.4 U11.8 | length 3521.7
  Bottom Layer w10: U8.4 4909.45,2067.32 4909.45,2433.07 5192.91,2716.54 5192.91,3476.38 5437.4,3720.87 U11.8 ; U11.8@5524.02,3720.87 5865.75,3720.87 5913.39,3673.23 5913.39,3555.91 ; U7.5 5867.72,3222.05 5980.31,3334.65 ; U7.2 5879.53,3522.05 5913.39,3555.91 ; U7.9 6066.93,3122.05 5980.31,3208.66 5980.31,3334.65 ; 5913.39,3555.91 5913.39,3401.57 5980.31,3334.65
O8: U11.9
O9: U7.13 U11.10 | length 831.8
  Bottom Layer w10: U11.10 5759.84,3920.87 5988.19,3692.52 5988.19,3574.8 6040.94,3522.05 U7.13
O10: U8.3 U11.11 | length 2285.5
  Bottom Layer w10: U8.3 4870.08,2127.95 4870.08,2456.69 5153.54,2740.16 5153.54,3677.17 5497.24,4020.87 U11.11
O11: U11.13
O12: U7.10 U8.1 U11.14 | length 5775.3
  Bottom Layer w10: U8.1 4787.01,2487.8 5118.11,2818.9 5118.11,3803.15 5389.76,4074.8 5657.48,4074.8 6035.43,3696.85 6141.73,3696.85 6169.29,3669.29 6169.29,3385.83 6153.54,3370.08 6074.8,3370.08 6051.18,3346.46 6051.18,3281.1 U7.10 6182.68,3222.05 6227.17,3266.54 6227.17,3694.09 6161.42,3759.84 6082.68,3759.84 5618.11,4224.41 5238.19,4224.41 5034.65,4020.87 U11.14
O13: U7.11 U11.15 | length 2047.2
  Bottom Layer w10: U11.15 5034.65,3920.87 5302.76,4188.98 5590.55,4188.98 6051.18,3728.35 6153.54,3728.35 6200.79,3681.1 6200.79,3342.52 6180.31,3322.05 U7.11
O14: U8.2 U11.16 | length 2045
  Bottom Layer w10: U8.2 4713.39,2144.88 4653.54,2204.72 4653.54,2551.18 5082.68,2980.32 5082.68,3688.98 4951.27,3820.39 4913.08,3820.39 U11.16
O15: U8.5 U8.13 U11.17 | length 2796.9
  Bottom Layer w10: U11.17 4964.17,3720.87 5059.06,3625.98 5059.06,3007.87 4590.55,2539.37 4590.55,1925.2 4670.87,1844.88 U8.5 4833.07,1844.88 4862.2,1874.02 4862.2,1980.32 5026.77,2144.88 U8.13
Y1: U3.10 U3.12 U8.12 | length 2082.5
  Bottom Layer w10: U3.10 4096.85,1844.88 4055.12,1803.15 ; U3.12 4096.06,2044.88 4055.12,2003.94 4055.12,1803.15 ; U8.12 5040.94,2044.88 4913.39,1917.32 4913.39,1637.8 4807.09,1531.5 4094.49,1531.5 4055.12,1570.87 4055.12,1803.15
Y2: U2.3 U3.13 | length 2721.9
  Bottom Layer w10: U3.13 4097.64,2144.88 4031.5,2078.74 4031.5,1559.06 4086.61,1503.94 4818.9,1503.94 4940.94,1625.98 4940.94,1905.51 5035.43,2000 5631.89,2000 U2.3
Y3: U3.4 U8.6 | length 2677.3
  Bottom Layer w10: U3.4 3917.32,2011.81 3917.32,2066.93 3889.76,2094.49 3799.21,2094.49 3771.65,2122.05 3771.65,2303.15 3811.02,2342.52 3952.76,2342.52 4102.36,2192.91 4196.85,2192.91 4228.35,2161.42 4228.35,2031.5 4192.91,1996.06 4114.17,1996.06 4094.49,1976.38 4094.49,1909.45 4110.24,1893.7 4185.04,1893.7 4248.03,1830.71 4248.03,1728.35 4216.54,1696.85 4129.92,1696.85 4102.36,1669.29 4102.36,1618.11 4137.8,1582.68 4562.99,1582.68 4725.2,1744.88 U8.6
Y4: U2.6 U3.5 | length 2338.8
  Bottom Layer w10: U3.5 3907.09,1844.88 3960.63,1791.34 3960.63,1515.75 4055.12,1421.26 4858.27,1421.26 5027.56,1590.55 5027.56,1661.42 5059.06,1692.91 5624.8,1692.91 U2.6
Y5: U4.1 U8.8 | length 3160.6
  Bottom Layer w10: U4.1 2861.42,2244.88 2968.5,2137.8 2968.5,1476.38 3051.18,1393.7 4870.08,1393.7 5082.65,1606.27 5082.65,1640.52 U8.8
Y6: U4.2 U7.12 | length 6720
  Bottom Layer w10: U4.2 2851.18,2144.88 2925.2,2070.87 2925.2,1468.5 3027.56,1366.14 5622.05,1366.14 5952.76,1696.85 6027.56,1696.85 6086.61,1755.91 6086.61,2496.06 5720.47,2862.2 5720.47,3141.73 5748.03,3169.29 5885.83,3169.29 5984.25,3070.87 6157.48,3070.87 6181.1,3094.49 6181.1,3141.73 6153.54,3169.29 6059.06,3169.29 6015.75,3212.6 6015.75,3389.76 6048.03,3422.05 U7.12
Y7: U4.13 U7.6 | length 6681.6
  Bottom Layer w10: U4.13 2900.79,2334.65 2740.16,2334.65 2708.66,2303.15 2708.66,2137.8 2750,2096.46 2828.74,2096.46 2858.27,2066.93 2858.27,2023.62 2830.71,1996.06 2751.97,1996.06 2732.28,1976.38 2732.28,1905.51 2740.16,1897.64 2814.96,1897.64 2870.08,1842.52 2870.08,1433.07 2992.13,1311.02 5732.28,1311.02 6141.73,1720.47 6141.73,2790.55 U7.6
Y8: U2.8 U4.4 | length 3827.1
  Bottom Layer w10: U4.4 2854.33,1944.88 2893.7,1905.51 2893.7,1456.69 3011.81,1338.58 5670.47,1338.58 U2.8
Y9: U4.5 U7.8 | length 5368.5
  Bottom Layer w10: U4.5 2842.52,1792.91 2842.52,1413.39 2968.5,1287.4 5755.91,1287.4 6192.91,1724.41 6192.91,2939.37 U7.8
pads on no net: DS1.5 S1.1 S1.4 S1.5 S1.6 SW10.3 SW11.3 SW12.3 U1.11 U1.12 U1.13 U2.7 U2.11 U2.12 U2.13 U2.14 U3.7 U3.14 U4.8 U4.9 U4.10 U4.14 U7.7 U7.14 U8.7 U8.14 U9.14 U9.15 U10.14

## Polygon pours and split planes (outlines as drawn)
GND on Bottom Layer "GND_L02_P000" (solid, pour order 0): 1000,4937.01 1000,1255.91 6255.91,1255.91 6255.91,4937.01

## Keep-outs
Bottom Layer:
  circle w10: c6165.35,4669.29 r35
  circle w10: c6165.35,4669.29 r35
  circle w10: c5984.25,1342.52 r35
  circle w10: c1287.4,1350.39 r35
  circle w10: c5984.25,1342.52 r35

## Silkscreen, mask and mechanical layers (free items; w line width, h text height)
Top Overlay:
  text "0" at 1441.26,4582.99 h80
  text "1" at 1964.88,4575.12 h80
  text "2" at 2476.69,4575.12 h80
  text "3" at 2984.57,4575.12 h80
  text "4" at 1445.2,3984.57 h80
  text "5" at 1960.94,3984.57 h80
  text "6" at 2468.82,3984.57 h80
  text "7" at 2992.44,3980.63 h80
  text "8" at 1445.2,3401.89 h80
  text "9" at 1960.94,3397.95 h80
  text "A" at 2476.69,3394.02 h80
  text "B" at 2988.5,3394.02 h80
  text "C" at 1449.13,2811.34 h80
  text "D" at 1964.88,2807.4 h80
  text "E" at 2476.69,2807.4 h80
  text "F" at 2992.44,2803.46 h80

## Dimensions
1000,4937.01 to 6255.91,4937.01 on Top Paste
1000,1255.91 to 1000,4937.01 on Top Paste